# EAGLE board Main Board - Single-Panel (EAGLE 9.6.2), part 1 of 2
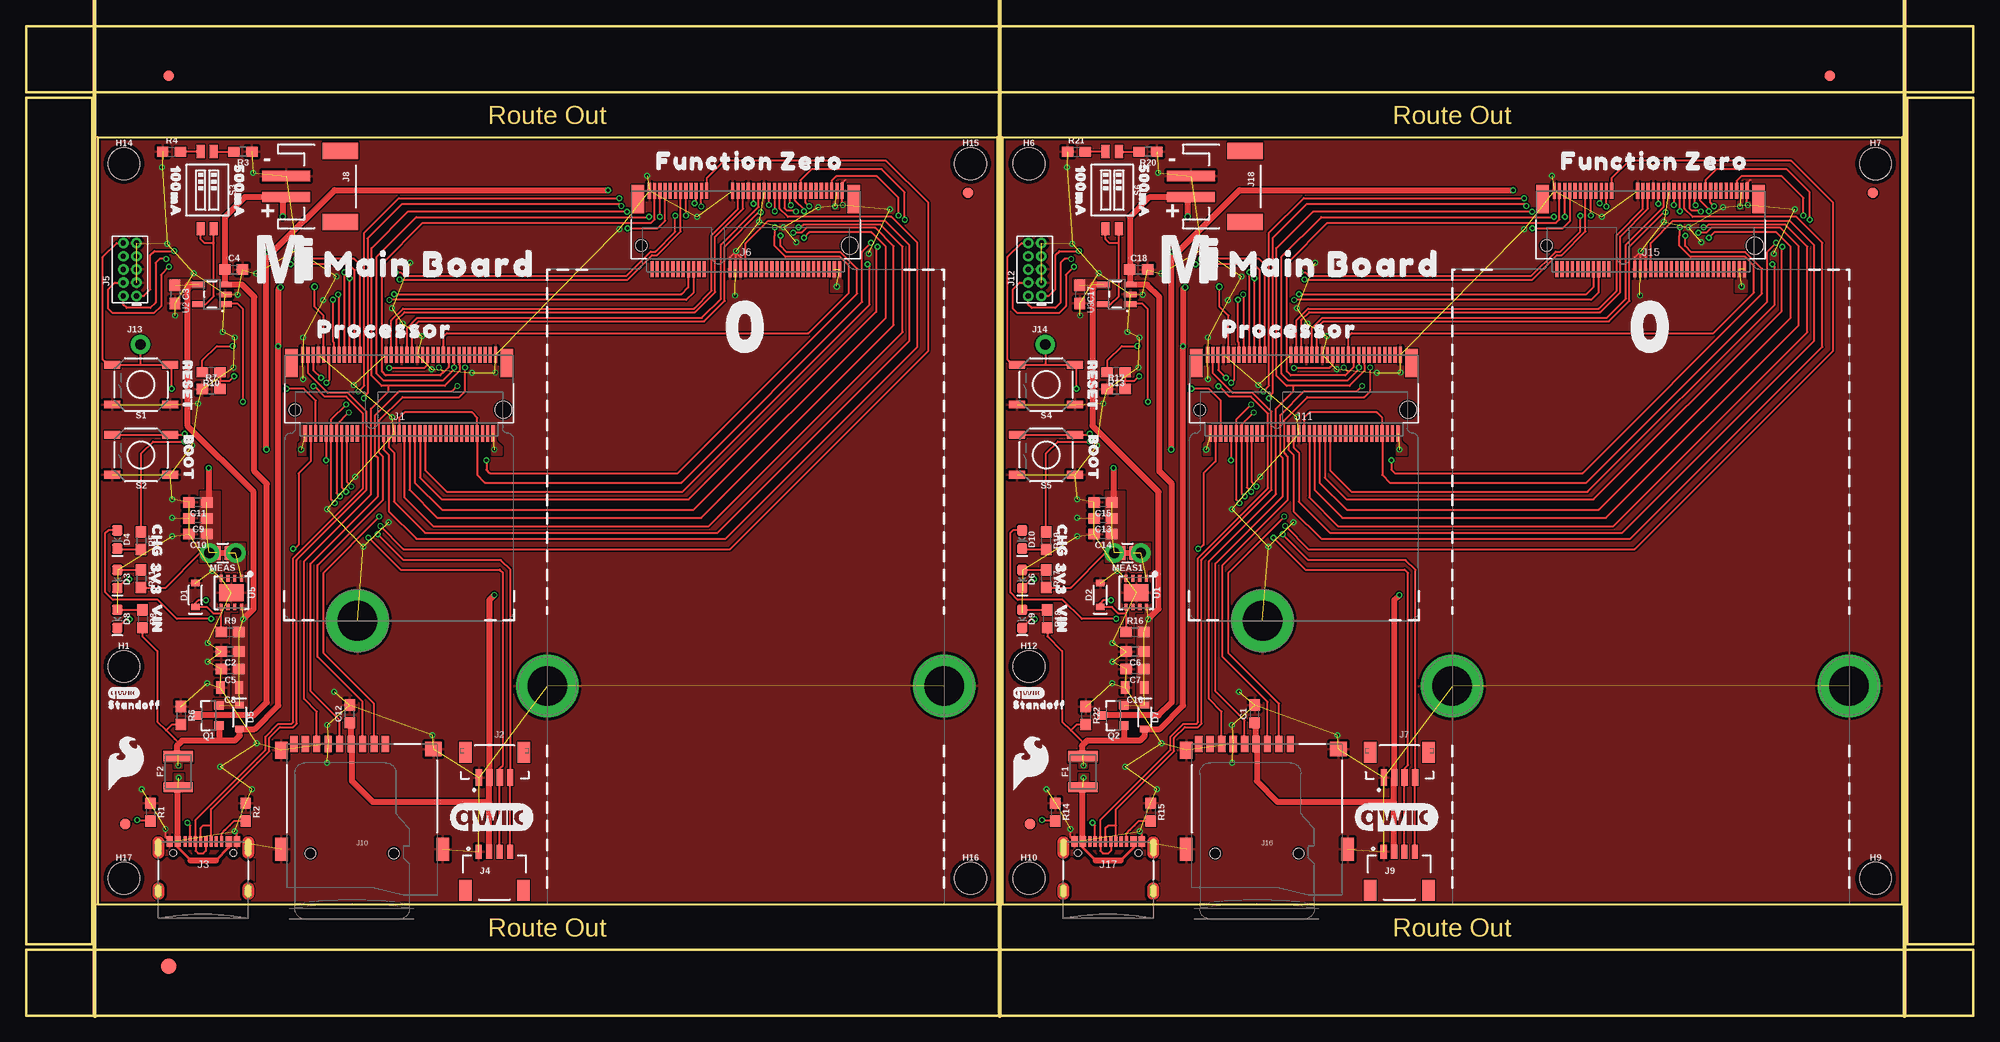
[diagram p0: board, top side]
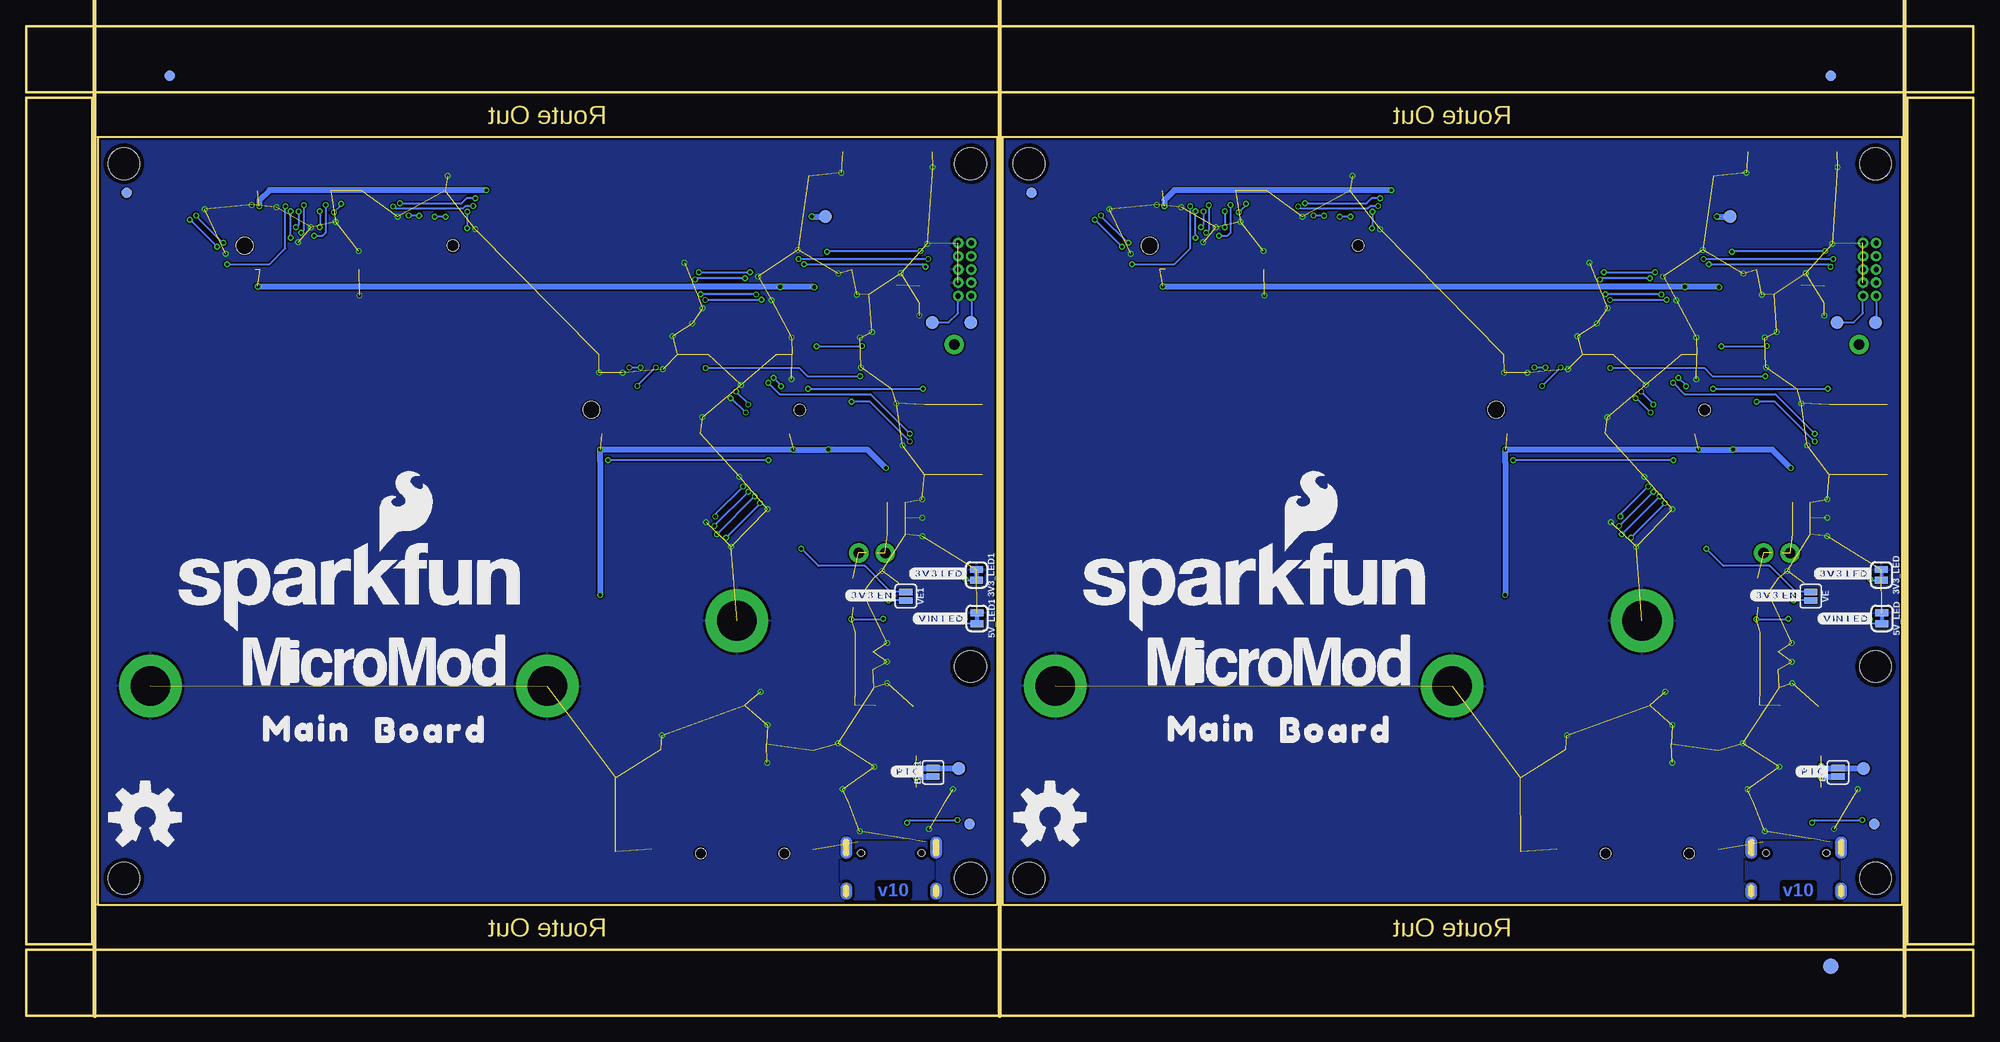
[diagram p1: board, bottom side, seen from below]

Size 186.94 x 95 mm. Coordinates in mm from the lower left corner, seen from the top.
Outline: 93.22,10.67 6.86,10.67 6.86,84.33 93.22,84.33 93.22,10.67
Outline: 180.09,10.67 93.73,10.67 93.73,84.33 180.09,84.33 180.09,10.67
Outline: 0,6.35 186.94,6.35 186.94,0 0,0 0,6.35
Outline: 180.59,88.14 186.94,88.14 186.94,6.86 180.59,6.86 180.59,88.14
Outline: 0,95 186.94,95 186.94,88.65 0,88.65 0,95
Outline: 0,88.14 6.35,88.14 6.35,6.86 0,6.86 0,88.14
Copper layers (1*16): Top 0.035mm / dielectric 1.5mm / Bottom 0.035mm
Design rules "Main Board - Single": minimum track width 5mil, minimum drill 0.3mm, track to track 5mil, track to pad 5mil, pad to pad 5mil, via to via 5mil, smd to smd 5mil, copper to edge 7mil, drill to drill 7mil, minimum pad ring 5mil, minimum via ring 5mil, stop-mask expansion 2.5mil, vias tented up to drill 25mil, thermal gap 10mil
Net classes: 0 default: width 0.178 mm, drill 0.305 mm; 1 POWER: width 0.559 mm, drill 0.305 mm; 2 Diff pairs: width 0.203 mm, drill 0.305 mm
tRestrict: area 67.8,71.4 to 67.9,71.9; area 68.3,71.4 to 68.4,71.9; area 154.6,71.4 to 154.8,71.9; area 155.1,71.4 to 155.3,71.9
Milling: 3 lines

## Footprints (pad centres in the part's own frame; a part is rotated, then mirrored left to right if it is on the bottom)
SMT-JUMPER_2_NC_TRACE_SILK = smd 0.66 x 1.27: 1 -0.521,0; 2 0.521,0
SMT-JUMPER_2_NO_SILK = smd 0.635 x 1.27: 1 -0.406,0; 2 0.406,0
0603 = smd 1.1 x 1: 1 -0.85,0; 2 0.85,0
0805 = smd 0.8 x 1.2: 1 -0.9,0; 2 0.9,0
SOD-323 = smd 0.63 x 0.83: A 1.15,0; C -1.15,0
LED-0603 = smd 1 x 1: A -0.877,0; C 0.877,0
FIDUCIAL-1X2 = smd 1 x 1: 1 0,0
FIDUCIAL-1.5X3 = smd 1.5 x 1.5: 1 0,0
1210 = smd 1 x 2.8: 1 -1.5,0; 2 1.5,0
STAND-OFF-TIGHT = hole 3.048: 0,0
STAND-OFF-REFLOW-M2.5 = drill 3.8 pad 6: 1 0,0
M.2-CONNECTOR-E = smd 0.3 x 1.55: 1 9.25,-5.275; 2 9,2.275; 3 8.75,-5.275; 4 8.5,2.275; 5 8.25,-5.275; 6 8,2.275; 7 7.75,-5.275; 8 7.5,2.275; 9 7.25,-5.275; 10 7,2.275; 11 6.75,-5.275; 12 6.5,2.275; 13 6.25,-5.275; 14 6,2.275; 15 5.75,-5.275; 16 5.5,2.275; 17 5.25,-5.275; 18 5,2.275; 19 4.75,-5.275; 20 4.5,2.275; 21 4.25,-5.275; 22 4,2.275; 23 3.75,-5.275; 32 1.5,2.275; 33 1.25,-5.275; 34 1,2.275; 35 0.75,-5.275; 36 0.5,2.275; 37 0.25,-5.275; 38 0,2.275; 39 -0.25,-5.275; 40 -0.5,2.275; 41 -0.75,-5.275; 42 -1,2.275; 43 -1.25,-5.275; 44 -1.5,2.275; 45 -1.75,-5.275; 46 -2,2.275; 47 -2.25,-5.275; 48 -2.5,2.275; 49 -2.75,-5.275; 50 -3,2.275; 51 -3.25,-5.275; 52 -3.5,2.275; 53 -3.75,-5.275; 54 -4,2.275; 55 -4.25,-5.275; 56 -4.5,2.275; 57 -4.75,-5.275; 58 -5,2.275; 59 -5.25,-5.275; 60 -5.5,2.275; 61 -5.75,-5.275; 62 -6,2.275; 63 -6.25,-5.275; 64 -6.5,2.275; 65 -6.75,-5.275; 66 -7,2.275; 67 -7.25,-5.275; 68 -7.5,2.275; 69 -7.75,-5.275; 70 -8,2.275; 71 -8.25,-5.275; 72 -8.5,2.275; 73 -8.75,-5.275; 74 -9,2.275; 75 -9.25,-5.275 | smd 1.2 x 2.75: A1 10.35,-4.5; A2 -10.35,-4.5 | hole 1.1: 10,0 | hole 1.6: -10,0
JST04_1MM_VERT = smd 0.6 x 1.55: 1 -1.478,0.775; 2 -0.478,0.775; 3 0.522,0.775; 4 1.522,0.775 | smd 1.2 x 2: NC1 -2.778,3.2; NC2 2.822,3.2
USB-C-16P-2LAYER-PADS = smd 0.3 x 1: A5 -1.25,-0.34; A6 -0.25,-0.34; A7 0.25,-0.34; A8 1.25,-0.34; B5 1.75,-0.34; B6 0.75,-0.34; B7 -0.75,-0.34; B8 -1.75,-0.34 | smd 0.6 x 1: GND -3.225,-0.34; GND2 3.225,-0.34; VBUS1 -2.45,-0.34; VBUS2 2.45,-0.34 | drill 0.4 pad 0.6 long: SHLD1 -4.318,-0.915; SHLD2 4.318,-0.915; SHLD3 -4.318,-5.095; SHLD4 4.318,-5.095 | hole 0.65: -2.89,-1.445; 2.89,-1.445
JST04_1MM_RA = smd 0.6 x 1.35: 1 -1.5,0; 2 -0.5,0; 3 0.5,0; 4 1.5,0 | smd 1.2 x 2: NC1 2.8,-3.675; NC2 -2.8,-3.675
2X5-PTH-1.27MM = drill 0.508 pad 1: 1 -2.54,-0.635; 2 -2.54,0.635; 3 -1.27,-0.635; 4 -1.27,0.635; 5 0,-0.635; 6 0,0.635; 7 1.27,-0.635; 8 1.27,0.635; 9 2.54,-0.635; 10 2.54,0.635
M.2-CONNECTOR-E-FUNCTION-STANDARD = smd 0.3 x 1.55: 1 9.25,-5.275; 2 9,2.275; 3 8.75,-5.275; 4 8.5,2.275; 5 8.25,-5.275; 6 8,2.275; 7 7.75,-5.275; 8 7.5,2.275; 9 7.25,-5.275; 10 7,2.275; 11 6.75,-5.275; 12 6.5,2.275; 13 6.25,-5.275; 14 6,2.275; 15 5.75,-5.275; 16 5.5,2.275; 17 5.25,-5.275; 18 5,2.275; 19 4.75,-5.275; 20 4.5,2.275; 21 4.25,-5.275; 22 4,2.275; 23 3.75,-5.275; 32 1.5,2.275; 33 1.25,-5.275; 34 1,2.275; 35 0.75,-5.275; 36 0.5,2.275; 37 0.25,-5.275; 38 0,2.275; 39 -0.25,-5.275; 40 -0.5,2.275; 41 -0.75,-5.275; 42 -1,2.275; 43 -1.25,-5.275; 44 -1.5,2.275; 45 -1.75,-5.275; 46 -2,2.275; 47 -2.25,-5.275; 48 -2.5,2.275; 49 -2.75,-5.275; 50 -3,2.275; 51 -3.25,-5.275; 52 -3.5,2.275; 53 -3.75,-5.275; 54 -4,2.275; 55 -4.25,-5.275; 56 -4.5,2.275; 57 -4.75,-5.275; 58 -5,2.275; 59 -5.25,-5.275; 60 -5.5,2.275; 61 -5.75,-5.275; 62 -6,2.275; 63 -6.25,-5.275; 64 -6.5,2.275; 65 -6.75,-5.275; 66 -7,2.275; 67 -7.25,-5.275; 68 -7.5,2.275; 69 -7.75,-5.275; 70 -8,2.275; 71 -8.25,-5.275; 72 -8.5,2.275; 73 -8.75,-5.275; 74 -9,2.275; 75 -9.25,-5.275 | smd 1.2 x 2.75: A1 10.35,-4.5; A2 -10.35,-4.5 | hole 1.1: 10,0 | hole 1.6: -10,0
JST-2-SMD = smd 1 x 4.6: 1 -1,-3.7; 2 1,-3.7 | smd 1.6 x 3.4: NC1 -3.4,1.5; NC2 3.4,1.5
MICROSD-EXTERNALPIN = smd 0.7 x 1.6: 1 2.25,10.5; 2 1.15,10.5; 3 0.05,10.5; 4 -1.05,10.5; 5 -2.15,10.5; 6 -3.25,10.5; 7 -4.35,10.5; 8 -5.45,10.5; 9 -6.55,10.5 | smd 1.2 x 1.6: 10 -7.75,9.9 | smd 1.2 x 2.2: 11 -7.75,0.4; 12 7.75,0.4 | smd 1.6 x 1.4: 13 6.85,10 | hole 1: 3.05,0; -4.95,0
1X01_NO_SILK = drill 1.016 pad 1.88: 1 0,0
COMBO-JUMPER_2_NC_TRACE = smd 0.635 x 1.27: 1 -0.508,0; 2 0.508,0 | drill 1.016 pad 1.88: 3 -1.27,0; 4 1.27,0
SOT23-3 = smd 0.8 x 0.9: 1 -0.95,-1; 2 0.95,-1; 3 0,1.1
TACTILE_SWITCH_SMD_5.2MM = smd 1.524 x 0.762: 1 -2.794,1.905; 2 2.794,1.905; 3 -2.794,-1.905; 4 2.794,-1.905
DIPSWITCH-02-50MIL = smd 0.762 x 1.27: 1 -0.635,-3.7; 2 0.635,-3.7; 3 0.635,3.7; 4 -0.635,3.7
PAD.03X.05 = smd 1.27 x 1.27: 1 0,0
UDFN-8 = smd 0.3 x 0.65: 1 -0.975,-1.375; 2 -0.325,-1.375; 3 0.325,-1.375; 4 0.975,-1.375; 5 0.975,1.375; 6 0.325,1.375; 7 -0.325,1.375; 8 -0.975,1.375 | smd 2.35 x 1.6: EP 0,0
SOT23-5 = smd 0.55 x 1.2: 1 -0.95,-1.3; 2 0,-1.3; 3 0.95,-1.3; 4 0.95,1.3; 5 -0.95,1.3

## Placement (x,y rotation side)
3V3_LED  [SMT-JUMPER_2_NC_TRACE_SILK]  8.84,42.32 270 bottom
3V3_LED1  [SMT-JUMPER_2_NC_TRACE_SILK]  95.71,42.32 270 bottom
5V_LED  [SMT-JUMPER_2_NC_TRACE_SILK]  8.79,38.15 270 bottom
5V_LED1  [SMT-JUMPER_2_NC_TRACE_SILK]  95.66,38.15 270 bottom
BYP  JUMPER-SMT_2_NO_SILK  [SMT-JUMPER_2_NO_SILK]  13,23.37 90 bottom
BYP1  JUMPER-SMT_2_NO_SILK  [SMT-JUMPER_2_NO_SILK]  99.87,23.37 90 bottom
C1  0.1uF  [0603]  117.96,28.98 90 top
C2  0.22uF  [0603]  19.6,34.95 180 top
C3  4.7uF  [0603]  14.3,69.24 270 top
C4  4.7uF  [0603]  19.94,71.63 0 top
C5  0.1uF  [0603]  19.6,33.27 180 top
C6  0.22uF  [0603]  106.46,34.95 180 top
C7  0.1uF  [0603]  106.46,33.27 180 top
C8  10uF  [0805]  19.56,31.5 180 top
C9  1.0uF  [0603]  16.51,47.75 180 top
C10  0.1uF  [0603]  16.51,46.23 180 top
C11  0.22uF  [0603]  16.51,49.28 180 top
C12  0.1uF  [0603]  31.09,28.98 90 top
C13  1.0uF  [0603]  103.38,47.75 180 top
C14  0.1uF  [0603]  103.38,46.23 180 top
C15  0.22uF  [0603]  103.38,49.28 180 top
C16  10uF  [0805]  106.43,31.5 180 top
C17  4.7uF  [0603]  101.17,69.24 270 top
C18  4.7uF  [0603]  106.81,71.63 0 top
D1  3.3V  [SOD-323]  16.26,40.39 90 top
D2  3.3V  [SOD-323]  103.12,40.39 90 top
D3  RED  [LED-0603]  8.76,41.91 270 top
D4  Yellow  [LED-0603]  8.76,45.72 270 top
D5  3A/10V/280mV  [SOD-323]  20.5,28.68 270 top
D6  RED  [LED-0603]  95.63,41.91 270 top
D7  3A/10V/280mV  [SOD-323]  107.37,28.68 270 top
D8  RED  [LED-0603]  8.76,38.1 270 top
D9  RED  [LED-0603]  95.63,38.1 270 top
D10  Yellow  [LED-0603]  95.63,45.72 270 top
E$1  [FIDUCIAL-1X2]  13.72,90.23 0 top
E$2  [FIDUCIAL-1X2]  13.72,90.23 0 bottom
E$3  [FIDUCIAL-1X2]  173.16,90.23 0 top
E$4  [FIDUCIAL-1X2]  173.16,90.23 0 bottom
E$5  [FIDUCIAL-1.5X3]  13.72,4.76 0 top
E$6  [FIDUCIAL-1.5X3]  13.72,4.76 0 bottom
F1  6V/2A  [1210]  101.47,23.44 90 top
F2  6V/2A  [1210]  14.61,23.44 90 top
FD1  FIDUCIAL1X2  [FIDUCIAL-1X2]  90.42,78.99 0 bottom
FD2  FIDUCIAL1X2  [FIDUCIAL-1X2]  90.42,78.99 0 top
FD3  FIDUCIAL1X2  [FIDUCIAL-1X2]  9.52,18.41 90 top
FD4  FIDUCIAL1X2  [FIDUCIAL-1X2]  9.52,18.41 270 bottom
FD5  FIDUCIAL1X2  [FIDUCIAL-1X2]  177.29,78.99 0 bottom
FD6  FIDUCIAL1X2  [FIDUCIAL-1X2]  177.29,78.99 0 top
FD7  FIDUCIAL1X2  [FIDUCIAL-1X2]  96.39,18.41 90 top
FD8  FIDUCIAL1X2  [FIDUCIAL-1X2]  96.39,18.41 270 bottom
H1  STAND-OFFTIGHT  [STAND-OFF-TIGHT]  9.4,33.53 0 top
H2  STAND-OFF-REFLOW-M2.5_2.5MM_TALL  [STAND-OFF-REFLOW-M2.5]  175.01,31.67 270 top
H3  STAND-OFF-REFLOW-M2.5_2.5MM_TALL  [STAND-OFF-REFLOW-M2.5]  88.14,31.67 270 top
H4  STAND-OFF-REFLOW-M2.5_2.5MM_TALL  [STAND-OFF-REFLOW-M2.5]  50.04,31.65 270 top
H5  STAND-OFF-REFLOW-M2.5_2.5MM_TALL  [STAND-OFF-REFLOW-M2.5]  118.69,37.92 270 top
H6  STAND-OFFTIGHT  [STAND-OFF-TIGHT]  96.27,81.79 0 top
H7  STAND-OFFTIGHT  [STAND-OFF-TIGHT]  177.55,81.79 0 top
H8  STAND-OFF-REFLOW-M2.5_2.5MM_TALL  [STAND-OFF-REFLOW-M2.5]  31.83,37.92 270 top
H9  STAND-OFFTIGHT  [STAND-OFF-TIGHT]  177.55,13.21 0 top
H10  STAND-OFFTIGHT  [STAND-OFF-TIGHT]  96.27,13.21 0 top
H11  STAND-OFF-REFLOW-M2.5_2.5MM_TALL  [STAND-OFF-REFLOW-M2.5]  136.91,31.65 270 top
H12  STAND-OFFTIGHT  [STAND-OFF-TIGHT]  96.27,33.53 0 top
H14  STAND-OFFTIGHT  [STAND-OFF-TIGHT]  9.4,81.79 0 top
H15  STAND-OFFTIGHT  [STAND-OFF-TIGHT]  90.68,81.79 0 top
H16  STAND-OFFTIGHT  [STAND-OFF-TIGHT]  90.68,13.21 0 top
H17  STAND-OFFTIGHT  [STAND-OFF-TIGHT]  9.4,13.21 0 top
J1  MICROMOD-2222-C  [M.2-CONNECTOR-E]  35.81,58.17 180 top
J2  Vertical Qwiic Connector  [JST04_1MM_VERT]  44.96,22.1 0 top
J3  [USB-C-16P-2LAYER-PADS]  17.02,17.07 0 top
J4  QWIIC_RIGHT_ANGLE  [JST04_1MM_RA]  44.96,15.75 0 top
J5  CORTEX_JTAG_DEBUG_MINIMUM_PTH  [2X5-PTH-1.27MM]  9.97,71.63 90 top
J6  MICROMOD_CARRIER  [M.2-CONNECTOR-E-FUNCTION-STANDARD]  69.09,73.91 180 top
J7  Vertical Qwiic Connector  [JST04_1MM_VERT]  131.83,22.1 0 top
J8  [JST-2-SMD]  28.68,79.6 270 top
J9  QWIIC_RIGHT_ANGLE  [JST04_1MM_RA]  131.83,15.75 0 top
J10  MICRO-SD-PUSH-PUSH-EXT-PIN  [MICROSD-EXTERNALPIN]  32.26,15.6 0 top
J11  MICROMOD-2222-C  [M.2-CONNECTOR-E]  122.68,58.17 180 top
J12  CORTEX_JTAG_DEBUG_MINIMUM_PTH  [2X5-PTH-1.27MM]  96.84,71.63 90 top
J13  [1X01_NO_SILK]  10.97,64.41 0 top
J14  [1X01_NO_SILK]  97.84,64.41 0 top
J15  MICROMOD_CARRIER  [M.2-CONNECTOR-E-FUNCTION-STANDARD]  155.96,73.91 180 top
J16  MICRO-SD-PUSH-PUSH-EXT-PIN  [MICROSD-EXTERNALPIN]  119.13,15.6 0 top
J17  [USB-C-16P-2LAYER-PADS]  103.89,17.07 0 top
J18  [JST-2-SMD]  115.54,79.6 270 top
LOGO1  QWIIC_LOGO_8MM  [QWIIC_8MM]  44.7,19.05 0 top
LOGO2  SFE_LOGO_NAME_FLAME.3_INCH  [SFE_LOGO_NAME_FLAME_.3]  69.09,41.15 0 bottom
LOGO3  OSHW-LOGOL  [OSHW-LOGO-L]  88.65,19.05 0 bottom
LOGO4  QWIIC_LOGO_8MM  [QWIIC_8MM]  131.57,19.05 0 top
LOGO5  SFE_LOGO_NAME_FLAME.3_INCH  [SFE_LOGO_NAME_FLAME_.3]  155.96,41.15 0 bottom
LOGO6  OSHW-LOGOL  [OSHW-LOGO-L]  175.51,19.05 0 bottom
MEAS  JUMPER-COMBO_2_NC_TRACE  [COMBO-JUMPER_2_NC_TRACE]  18.87,44.42 180 top
MEAS1  JUMPER-COMBO_2_NC_TRACE  [COMBO-JUMPER_2_NC_TRACE]  105.74,44.42 180 top
Q1  3.1A/30V/105mΩ  [SOT23-3]  17.53,28.83 90 top
Q2  3.1A/30V/105mΩ  [SOT23-3]  104.39,28.83 90 top
R1  5.1k  [0603]  11.94,19.56 270 top
R2  5.1k  [0603]  21.08,19.56 270 top
R3  2.0k  [0603]  20.83,82.93 180 top
R4  10k  [0603]  13.97,82.93 0 top
R5  1k  [0603]  11.05,45.59 270 top
R6  10k  [0603]  14.86,28.83 270 top
R7  10k  [0603]  17.78,60.15 0 top
R8  4.7k  [0603]  11.18,38.1 270 top
R9  100k  [0603]  19.6,36.83 0 top
R10  20k  [0603]  17.78,61.77 180 top
R11  1k  [0603]  11.05,41.96 270 top
R12  10k  [0603]  104.65,60.15 0 top
R13  20k  [0603]  104.65,61.77 180 top
R14  5.1k  [0603]  98.81,19.56 270 top
R15  5.1k  [0603]  107.95,19.56 270 top
R16  100k  [0603]  106.46,36.83 0 top
R17  1k  [0603]  97.92,41.96 270 top
R18  4.7k  [0603]  98.04,38.1 270 top
R19  1k  [0603]  97.92,45.59 270 top
R20  2.0k  [0603]  107.7,82.93 180 top
R21  10k  [0603]  100.84,82.93 0 top
R22  10k  [0603]  101.73,28.83 270 top
S1  Reset  [TACTILE_SWITCH_SMD_5.2MM]  11.05,60.58 180 top
S2  BOOT  [TACTILE_SWITCH_SMD_5.2MM]  11.05,53.85 180 top
S3  DIP-02-SMD-50MIL  [DIPSWITCH-02-50MIL]  17.4,79.25 180 top
S4  Reset  [TACTILE_SWITCH_SMD_5.2MM]  97.92,60.58 180 top
S5  BOOT  [TACTILE_SWITCH_SMD_5.2MM]  97.92,53.85 180 top
S6  DIP-02-SMD-50MIL  [DIPSWITCH-02-50MIL]  104.27,79.25 180 top
TP1  TEST-POINT3X5  [PAD.03X.05]  9.4,66.55 0 bottom
TP2  TEST-POINT3X5  [PAD.03X.05]  13.08,66.55 0 bottom
TP3  TEST-POINT3X5  [PAD.03X.05]  23.37,76.71 0 bottom
TP4  TEST-POINT3X5  [PAD.03X.05]  10.54,23.75 0 bottom
TP5  TEST-POINT3X5  [PAD.03X.05]  99.95,66.55 0 bottom
TP6  TEST-POINT3X5  [PAD.03X.05]  110.24,76.71 0 bottom
TP7  TEST-POINT3X5  [PAD.03X.05]  97.41,23.75 0 bottom
TP8  TEST-POINT3X5  [PAD.03X.05]  96.27,66.55 0 bottom
U1  AP7361C-33  [UDFN-8]  106.58,40.61 180 top
U2  MCP73831  [SOT23-5]  17.83,69.24 90 top
U3  MCP73831  [SOT23-5]  104.7,69.24 90 top
U5  AP7361C-33  [UDFN-8]  19.71,40.61 180 top
U$1  [3V332530]  12.45,41.91 270 top
U$2  [VIN32529]  12.57,38.1 270 top
U$3  [CHG32528]  12.57,45.59 270 top
U$4  [FUNCTION_ZERO517]  69.47,82.04 0 top
U$5  [PROCESSOR522]  34.42,65.91 0 top
U$6  [#3V3_LED#17]  12.45,42.44 0 bottom
U$7  [#VIN_LED#16]  12.24,38.13 0 bottom
U$8  [#PTC#18]  15.39,23.44 0 bottom
U$9  [BOOT32541]  15.6,53.57 270 top
U$10  [RESET32540]  15.49,60.45 270 top
U$11  [#3V3_EN#18]  18.9,40.36 0 bottom
U$12  [MICROMOD_MI_LOGO_1]  24.89,72.64 0 top
U$13  [0525]  69.34,66.04 0 top
U$14  [MICROMOD_LOGO_1]  66.67,34.16 0 bottom
U$15  [MAIN523]  73.15,27.56 0 bottom
U$16  [BOARD524]  61.21,27.43 0 bottom
U$17  [100MA6]  14.35,79.12 270 top
U$18  [500MA101]  20.45,79.12 270 top
U$19  [MAIN_BOARD5523]  38.73,72.14 0 top
U$20  [QWIIC_3MM]  9.4,30.99 0 top
U$21  [STANDOFF501]  10.41,29.84 0 top
U$22  [SFE_LOGO_FLAME_.2]  9.61,24.21 0 top
U$23  [3V332530]  99.31,41.91 270 top
U$24  [VIN32529]  99.44,38.1 270 top
U$25  [CHG32528]  99.44,45.59 270 top
U$26  [FUNCTION_ZERO517]  156.34,82.04 0 top
U$27  [PROCESSOR522]  121.29,65.91 0 top
U$28  [#3V3_LED#17]  99.31,42.44 0 bottom
U$29  [#VIN_LED#16]  99.11,38.13 0 bottom
U$30  [#PTC#18]  102.26,23.44 0 bottom
U$31  [BOOT32541]  102.46,53.57 270 top
U$32  [RESET32540]  102.36,60.45 270 top
U$33  [#3V3_EN#18]  105.77,40.36 0 bottom
U$34  [MICROMOD_MI_LOGO_1]  111.76,72.64 0 top
U$35  [0525]  156.21,66.04 0 top
U$36  [MAIN523]  160.02,27.56 0 bottom
U$37  [BOARD524]  148.08,27.43 0 bottom
U$38  [100MA6]  101.22,79.12 270 top
U$39  [500MA101]  107.31,79.12 270 top
U$40  [MAIN_BOARD5523]  125.6,72.14 0 top
U$41  [MICROMOD_LOGO_1]  153.54,34.16 0 bottom
U$42  [QWIIC_3MM]  96.27,30.99 0 top
U$43  [STANDOFF501]  97.28,29.84 0 top
U$44  [SFE_LOGO_FLAME_.2]  96.48,24.21 0 top
VE  [SMT-JUMPER_2_NO_SILK]  15.62,40.28 270 bottom
VE1  [SMT-JUMPER_2_NO_SILK]  102.49,40.28 270 bottom

## Library data of the parts
3V3_LED 3V3_LED1 5V_LED 5V_LED1 BYP BYP1 MEAS MEAS1 VE VE1 = SparkFun-Jumpers
C1 C5 C7 C10 C12 C14 = SparkFun-Capacitors; PROD_ID: CAP-00810
C2 C6 C11 C15 = SparkFun-Capacitors; PROD_ID: CAP-07822
C3 C17 = SparkFun-Capacitors; PROD_ID: CAP-08280
C4 C18 = SparkFun-Capacitors; PROD_ID: CAP-14106
C8 C16 = SparkFun-Capacitors; PROD_ID: CAP-11330
C9 C13 = SparkFun-Capacitors; PROD_ID: CAP-00868
D1 D2 = SparkFun-DiscreteSemi; PROD_ID: DIO-11284
D3 D6 D8 D9 = SparkFun-LED; PROD_ID: DIO-00819
D4 D10 = SparkFun-LED; PROD_ID: DIO-09003
D5 D7 = SparkFun-DiscreteSemi; PROD_ID: DIO-14072
E$1-E$4 FD1-FD8 LOGO1-LOGO6 U$20 U$22 U$42 U$44 = SparkFun-Aesthetics
E$5 E$6 = SparkFun-Retired
F1 F2 = SparkFun-Fuses; PROD_ID: RES-14313
H1 H6 H7 H9 H10 H12 H14-H17 = SparkFun-Hardware
H2-H5 H8 H11 = SparkFun-Hardware; PROD_ID: HW-14899
J1 J11 = SparkFun-MicroMod; PROD_ID: CONN-14877
J2 J7 = SparkFun-Connectors; PROD_ID: CONN-14483
J3 J17 = SparkFun-Connectors; PROD_ID: CONN-14122
J4 J9 = SparkFun-Connectors; PROD_ID: CONN-13694
J5 J12-J14 TP1-TP8 = SparkFun-Connectors
J6 J15 = SparkFun-MicroMod-Function; PROD_ID: CONN-14877
J8 J18 = SparkFun-Connectors; PROD_ID: CONN-11443; SF_ID: PRT-08612
J10 J16 = SparkFun-Connectors; PROD_ID: CONN-16110
Q1 Q2 = SparkFun-DiscreteSemi; PROD_ID: TRANS-11308
R1 R2 R14 R15 = SparkFun-Resistors; PROD_ID: RES-12083
R3 R20 = SparkFun-Resistors; PROD_ID: RES-08296
R4 R6 R7 R12 R21 R22 = SparkFun-Resistors; PROD_ID: RES-00824
R5 R11 R17 R19 = SparkFun-Resistors; PROD_ID: RES-07856
R8 R18 = SparkFun-Resistors; PROD_ID: RES-07857
R9 R16 = SparkFun-Resistors; PROD_ID: RES-07828
R10 R13 = SparkFun-Resistors; PROD_ID: RES-09383
S1 S2 S4 S5 = SparkFun-Switches; PROD_ID: SWCH-14139
S3 S6 = SparkFun-Switches; PROD_ID: SWCH-13215
U1 U5 = SparkFun-IC-Power; PROD_ID: VREG-14094
U2 U3 = SparkFun-IC-Power; PROD_ID: IC-09995
U$1-U$11 U$13 U$15-U$19 U$21 U$23-U$33 U$35-U$40 U$43 = top
U$12 U$14 U$34 U$41 = SparkFun-MicroMod

## Nets
3.3V [POWER]: C9.1 C10.1 C11.1 C12.1 J1.2 J1.74 J2.2 J4.2 J5.1 J6.73 J10.4 MEAS.2 MEAS.4 R11.2 TP2.1
3.3V1 [POWER]: C1.1 C13.1 C14.1 C15.1 J7.2 J9.2 J11.2 J11.74 J12.1 J15.73 J16.4 MEAS1.2 MEAS1.4 R17.2 TP5.1
3.3V_EN: J1.4 VE.1
3.3V_EN1: J11.4 VE1.1
3.3V_EN_VE: D1.C R9.1 U5.5 VE.2
3.3V_EN_VE1: D2.C R16.1 U1.5 VE1.2
!BOOT!: J1.11 S2.3 S2.4
!BOOT!1: J11.11 S5.3 S5.4
!CS0!-PROCESSOR: J1.55 J6.49
!CS0!-PROCESSOR1: J11.55 J15.49
!RESET!: J1.6 J5.10 J13.1 S1.3 S1.4
!RESET!1: J11.6 J12.10 J14.1 S4.3 S4.4
A0-PROCESSOR: J1.34 J6.38
A0-PROCESSOR1: J11.34 J15.38
CTS1-PROCESSOR: J1.15 J6.16
CTS1-PROCESSOR1: J11.15 J15.16
D0-PROCESSOR: J1.10 J6.47
D0-PROCESSOR1: J11.10 J15.47
D1-PROCESSOR/SD_CARD_!CS!: J1.18 J10.2
D1-PROCESSOR/SD_CARD_!CS!1: J11.18 J16.2
D+ [Diff pairs]: J1.3 J3.A6 J3.B6
D+1 [Diff pairs]: J11.3 J17.A6 J17.B6
D- [Diff pairs]: J1.5 J3.A7 J3.B7
D-1 [Diff pairs]: J11.5 J17.A7 J17.B7
G0-PROCESSOR: J1.40 J6.53
G0-PROCESSOR1: J11.40 J15.53
G1-PROCESSOR: J1.42 J6.55
G1-PROCESSOR1: J11.42 J15.55
G2-PROCESSOR: J1.44 J6.57
G2-PROCESSOR1: J11.44 J15.57
G3-PROCESSOR: J1.46 J6.59
G3-PROCESSOR1: J11.46 J15.59
G4-PROCESSOR: J1.48 J6.61
G4-PROCESSOR1: J11.48 J15.61
GND: 3V3_LED.1 5V_LED.1 C2.2 C3.2 C4.2 C5.2 C8.2 C9.2 C10.2 C11.2 C12.2 D1.A H3.1 H4.1 H8.1 J1.1 J1.7 J1.33 J1.36 J1.39 J1.45 J1.75 J2.1 J3.GND J3.GND2 J4.1 J5.3 J5.5 J5.9 J6.1 J6.32 J6.33 J6.34 J6.36 J6.39 J6.45 J6.75 J8.1 J10.6 J10.10 J10.11 J10.12 J10.13 R1.1 R2.1 R3.1 R4.1 R6.1 R7.1 S1.1 S1.2 S2.1 S2.2 U2.2 U5.4 U5.EP
GND1: 3V3_LED1.1 5V_LED1.1 C1.2 C6.2 C7.2 C13.2 C14.2 C15.2 C16.2 C17.2 C18.2 D2.A H2.1 H5.1 H11.1 J7.1 J9.1 J11.1 J11.7 J11.33 J11.36 J11.39 J11.45 J11.75 J12.3 J12.5 J12.9 J15.1 J15.32 J15.33 J15.34 J15.36 J15.39 J15.45 J15.75 J16.6 J16.10 J16.11 J16.12 J16.13 J17.GND J17.GND2 J18.1 R12.1 R14.1 R15.1 R20.1 R21.1 R22.1 S4.1 S4.2 S5.1 S5.2 U1.4 U1.EP U3.2
HOST_D+ [Diff pairs]: J1.35 J6.35
HOST_D+1 [Diff pairs]: J11.35 J15.35
HOST_D- [Diff pairs]: J1.37 J6.37
HOST_D-1 [Diff pairs]: J11.37 J15.37
I2C_!INT!: J1.16 J6.23
I2C_!INT!1: J11.16 J15.23
I2C_SCL: J1.14 J2.4 J4.4 J6.21
I2C_SCL1: J7.4 J9.4 J11.14 J15.21
I2C_SDA: J1.12 J2.3 J4.3 J6.19
I2C_SDA1: J7.3 J9.3 J11.12 J15.19
N$1: J17.B5 R15.2
N$2: MEAS.1 MEAS.3 U5.1
N$3: D3.A R11.1
N$4: J3.B5 R2.2
N$5: J3.A5 R1.2
N$6 [POWER]: BYP.1 F2.1 J3.VBUS1 J3.VBUS2
N$7: R3.2 S3.1
N$8: S3.3 S3.4 U2.5
N$9: 5V_LED.2 D8.C
N$10: 3V3_LED.2 D3.C
N$11: R4.2 S3.2
N$12: D8.A R8.1
N$13: J17.A5 R14.2
N$14: D4.C R5.2
N$15: R5.1 U2.1
N$16: MEAS1.1 MEAS1.3 U1.1
N$17: D6.A R17.1
N$18 [POWER]: BYP1.1 F1.1 J17.VBUS1 J17.VBUS2
N$19: D9.A R18.1
N$20: 5V_LED1.2 D9.C
N$21: 3V3_LED1.2 D6.C
N$22: S6.3 S6.4 U3.5
N$23: D10.C R19.2
N$24: R19.1 U3.1
N$25: R20.2 S6.1
N$26: R21.2 S6.2
PROCESSOR_CAN-RX: J1.41 J6.43
PROCESSOR_CAN-RX1: J11.41 J15.43
PROCESSOR_CAN-TX: J1.43 J6.41
PROCESSOR_CAN-TX1: J11.43 J15.41
PWM0-PROCESSOR: J1.32 J6.51
PWM0-PROCESSOR1: J11.32 J15.51
PWR_EN0: J1.38 J1.68 J6.71
PWR_EN1: J11.38 J11.68 J15.71
RTS1-PROCESSOR: J1.13 J6.18
RTS1-PROCESSOR1: J11.13 J15.18
RX1-PROCESSOR: J1.19 J6.13
RX1-PROCESSOR1: J11.19 J15.13
SPI_PROCESSOR_SCK: J1.57 J6.3 J10.5
SPI_PROCESSOR_SCK1: J11.57 J15.3 J16.5
SPI_PROCESSOR_SDI: J1.61 J6.7 J10.7
SPI_PROCESSOR_SDI1: J11.61 J15.7 J16.7
SPI_PROCESSOR_SDO: J1.59 J6.5 J10.3
SPI_PROCESSOR_SDO1: J11.59 J15.5 J16.3
SWDCK: J1.21 J5.4
SWDCK1: J11.21 J12.4
SWDIO: J1.23 J5.2 TP1.1
SWDIO1: J11.23 J12.2 TP8.1
TX1-PROCESSOR: J1.17 J6.15
TX1-PROCESSOR1: J11.17 J15.15
V_BATT [POWER]: C4.1 J8.2 Q1.3 TP3.1 U2.3
V_BATT1 [POWER]: C18.1 J18.2 Q2.3 TP6.1 U3.3
VCC: C2.1 C3.1 C5.1 C8.1 D4.A D5.C Q1.2 R9.2 U2.4 U5.8
VCC1: C6.1 C7.1 C16.1 C17.1 D7.C D10.A Q2.2 R16.2 U1.8 U3.4
VIN: BYP.2 D5.A F2.2 J1.9 J6.72 J6.74 Q1.1 R6.2 R8.2 R10.2 TP4.1
VIN1: BYP1.2 D7.A F1.2 J11.9 J15.72 J15.74 Q2.1 R13.2 R18.2 R22.2 TP7.1
VIN/1: J11.49 R12.2 R13.1
VIN/3: J1.49 R7.2 R10.1